# Altium PCB PCB1.PcbDoc
Units mm, origin at the board's own origin, x right, y up, seen from the top; angles counter-clockwise.
Board outline 20.32 x 37.08 mm, 4 copper layers (Top Copper, Signal Layer 1, Signal Layer 2, Bottom Copper), stack 1.17 mm thick; 33 components, 26 nets, 122 pads, 45 vias.
Unrouted connection lines stored in the file: 37.
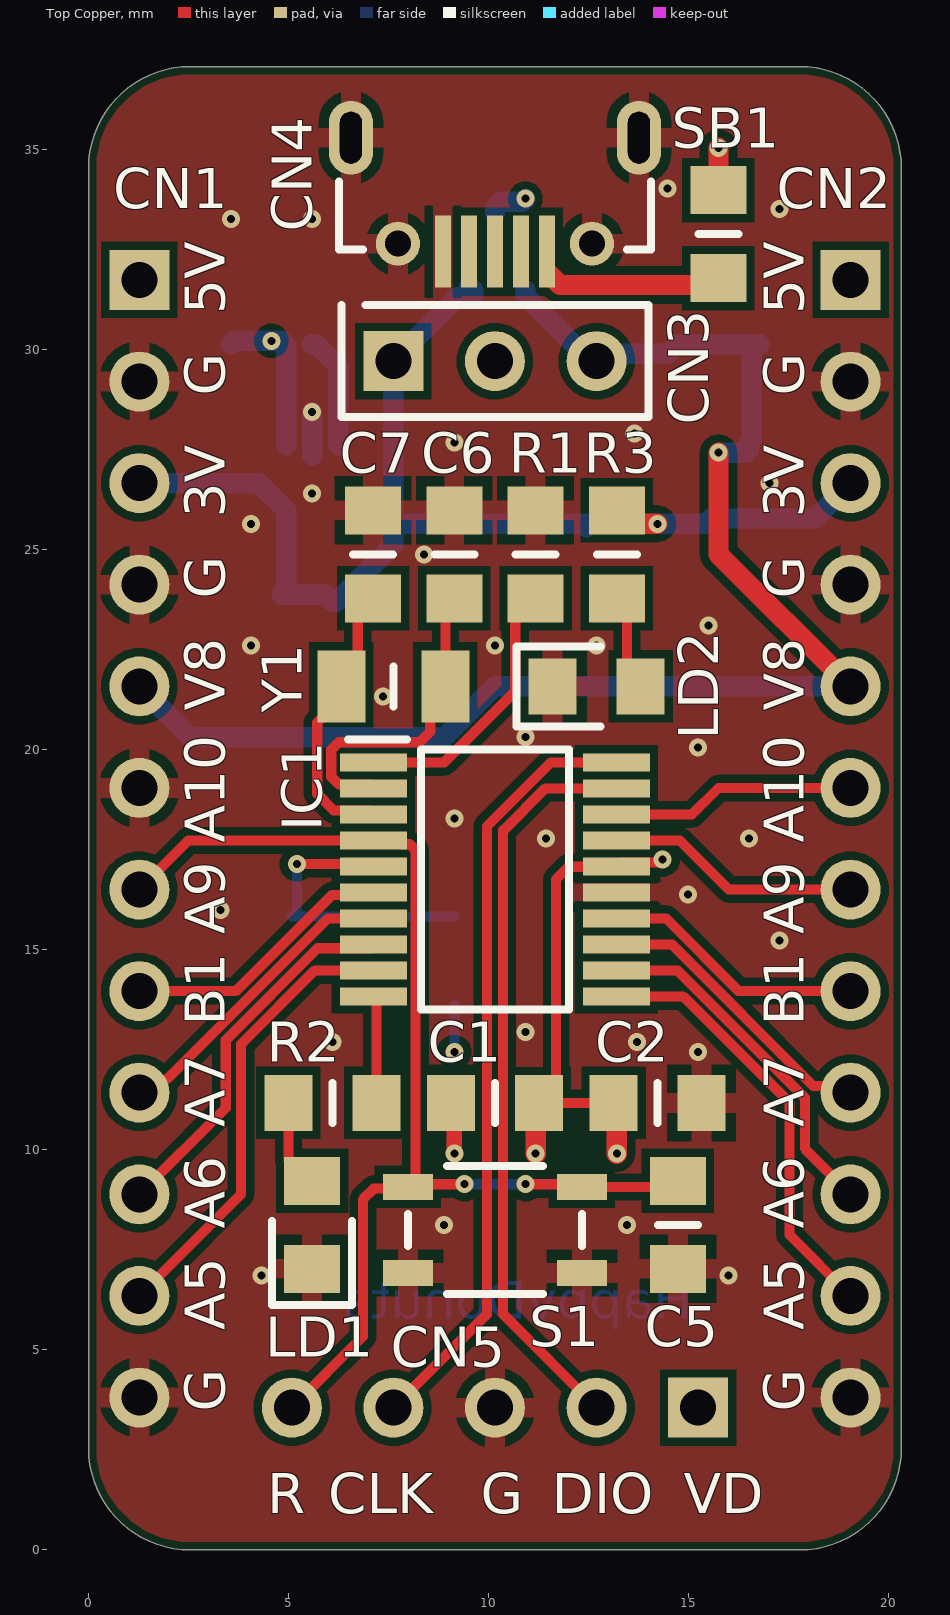
[diagram p0: Top Copper view]
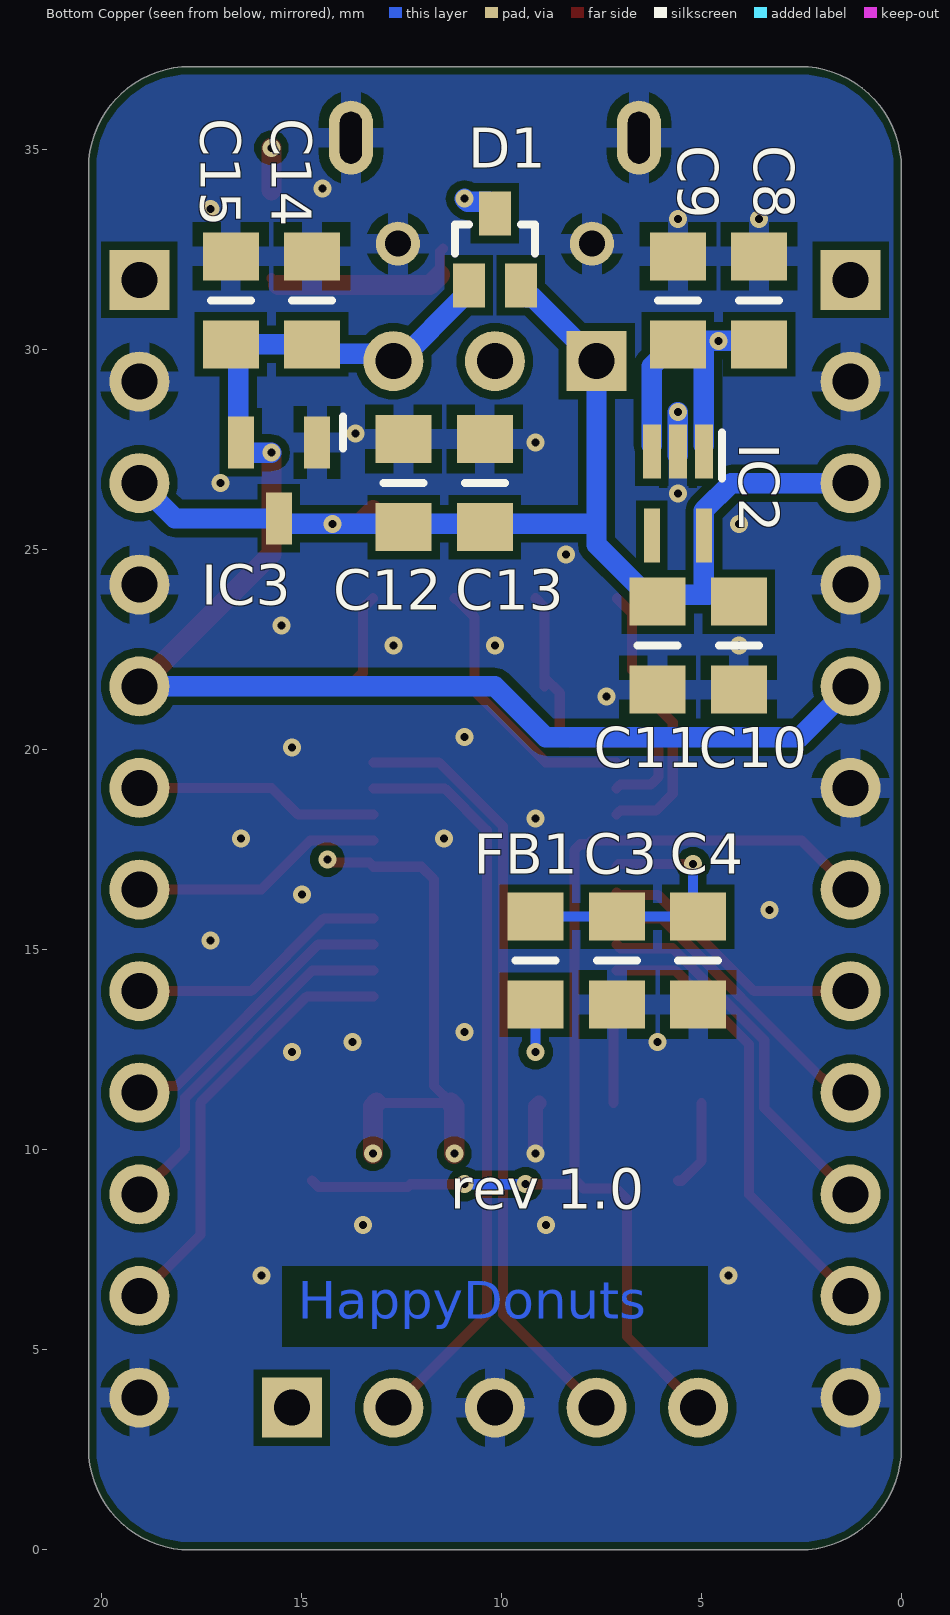
[diagram p1: Bottom Copper view, seen from below]
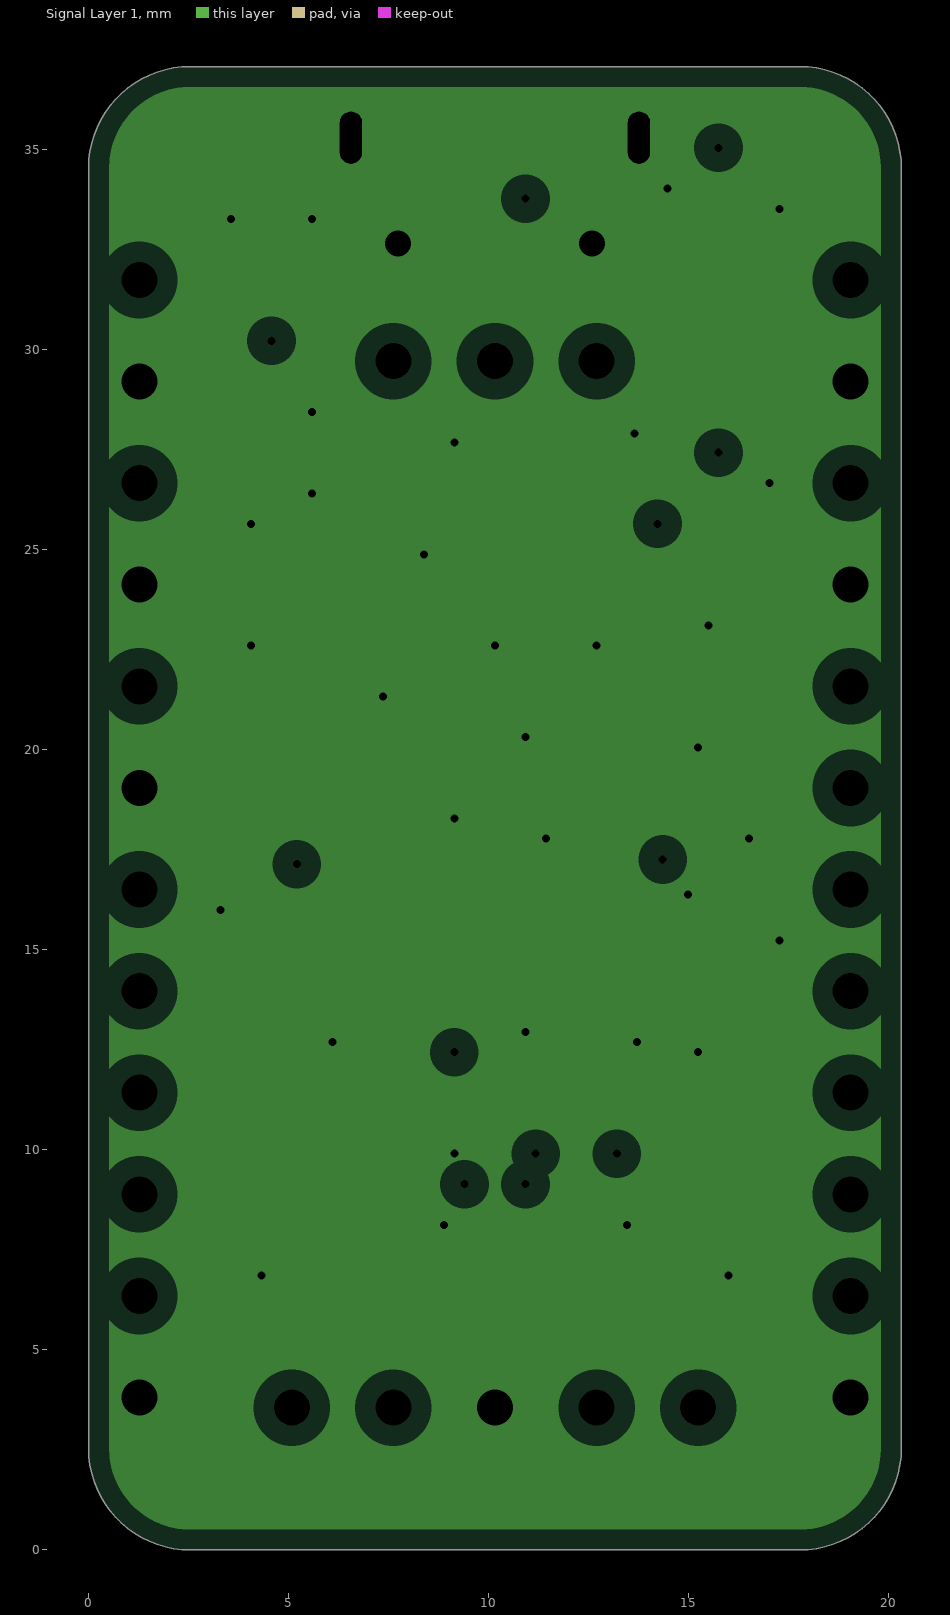
[diagram p2: Signal Layer 1, clearances drawn from the general rule]
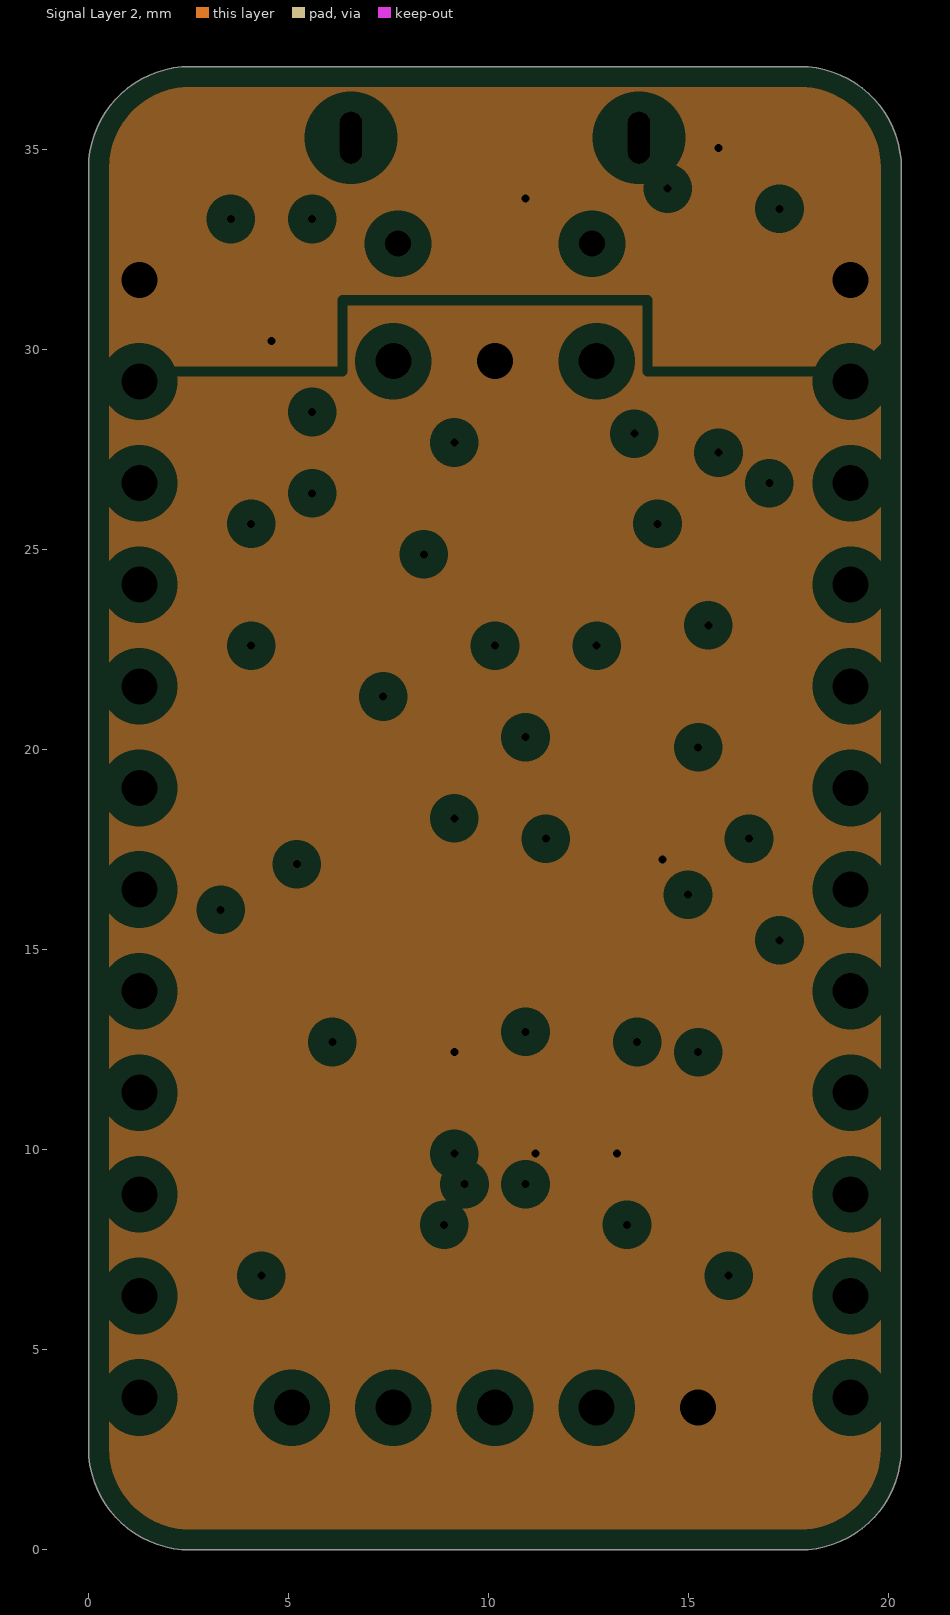
[diagram p3: Signal Layer 2, clearances drawn from the general rule]
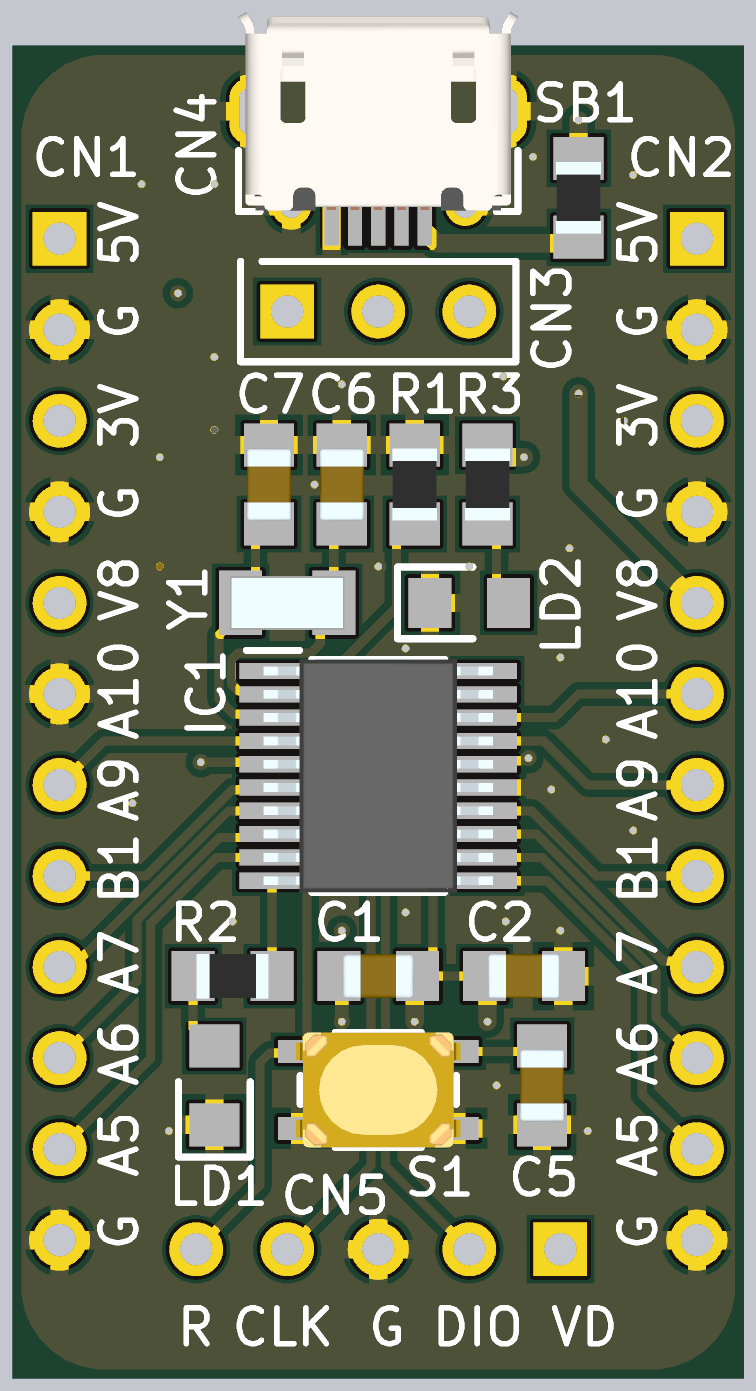
[diagram p4: 3D render of the assembled board from above, using the file's embedded part models]
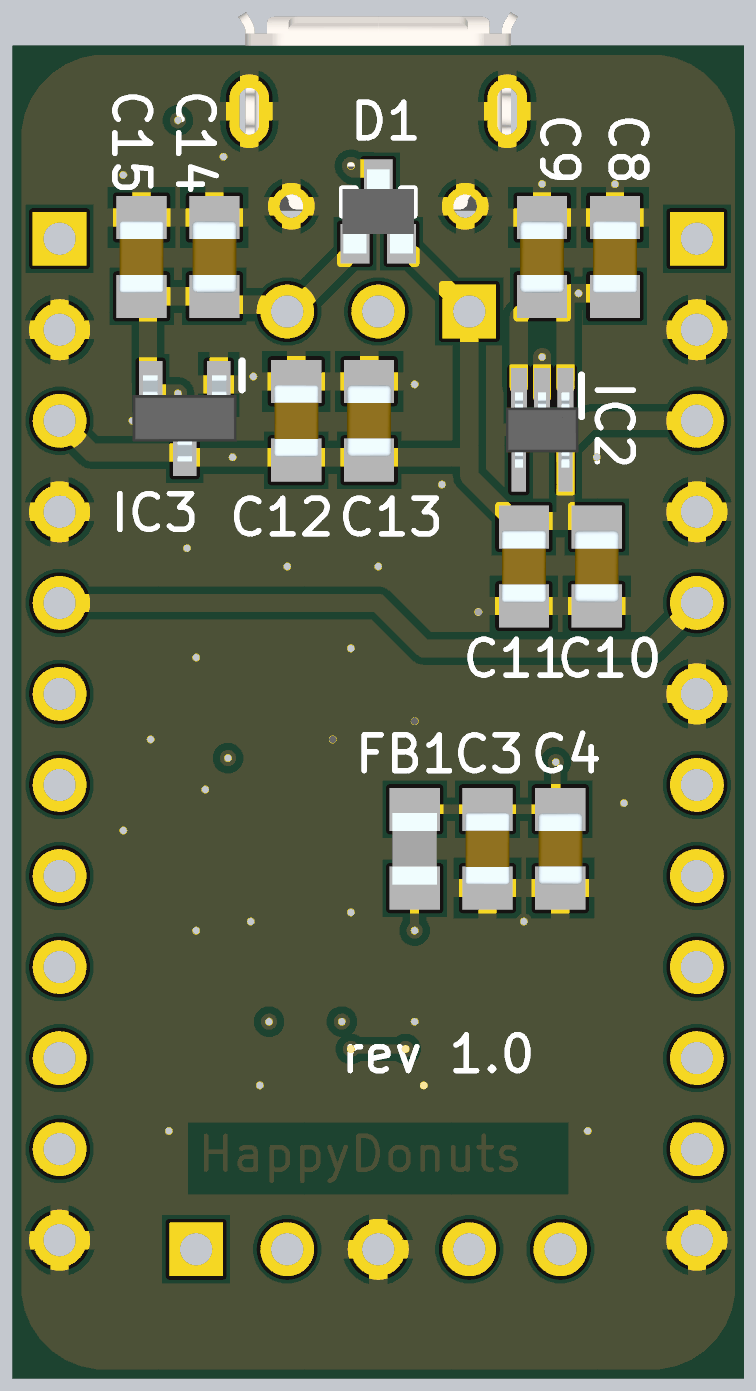
[diagram p5: 3D render of the assembled board from below, using the file's embedded part models]

## Layer stack, top to bottom
Top Mask: solder mask 0.015, Solder Resist, Dk 3.8
Top Copper: signal copper 0.035
Dielectric 1: prepreg 0.2, 7628, Dk 4.6
Signal Layer 1: plane copper 0.0175, net GND
Core: core 0.665, FR-4, Dk 4.5
Signal Layer 2: plane copper 0.0175, net (Multiple Nets)
Dielectric 2: prepreg 0.2, 7628, Dk 4.6
Bottom Copper: signal copper 0.035
Bottom Mask: solder mask 0.015, Solder Resist, Dk 3.8

## Board outline
0,2.54 0,34.544 cw(c2.54,34.544) 2.54,37.084 17.78,37.084 cw(c17.78,34.544) 20.32,34.544 20.32,2.54 cw(c17.78,2.54) 17.78,0 2.54,0 cw(c2.54,2.54)

## Design rules (kind name [scope] priority, off if disabled: settings)
BoardOutlineClearance [All] p1: gap=0.2 ignorepadtopadclearanceinfootprint=FALSE except(0.4: Arc-SplitBarrior Arc-SplitContinuation Track-SplitBarrior Track-SplitContinuation SMDPad-SplitBarrior SMDPad-SplitContinuation THPad-SplitBarrior THPad-SplitContinuation Via-SplitBarrior Via-SplitContinuation Fill-SplitBarrior Fill-SplitContinuation Poly-SplitBarrior Poly-SplitContinuation Region-SplitBarrior Region-SplitContinuation Text-SplitBarrior Text-SplitContinuation)
Clearance "Clearance Bottom Layer" [OnLayer('Bottom Layer')] p1: gap=0.203 ignorepadtopadclearanceinfootprint=TRUE except(0.254: Arc-Text Track-Text SMDPad-Text THPad-Text Via-Text Fill-Text Poly-Text Region-Text Text-Text)
Clearance "Clearance Top Layer" [OnLayer('Top Layer')] p2: gap=0.203 ignorepadtopadclearanceinfootprint=TRUE except(0.254: Arc-Text Track-Text SMDPad-Text THPad-Text Via-Text Fill-Text Poly-Text Region-Text Text-Text)
Clearance [All] p3: gap=0.2 ignorepadtopadclearanceinfootprint=FALSE except(0.089: Arc-Arc Arc-Track Arc-SMDPad Track-Track Track-SMDPad SMDPad-SMDPad; 0.127: Arc-Via Track-Via SMDPad-Via THPad-Via Via-Via; 0.254: Arc-Text Track-Text SMDPad-Text THPad-Text Via-Text Fill-Text Poly-Text Region-Text Text-Text)
HoleSize [All] p1: absolutevalues=TRUE maxlimit=6.3 minlimit=0.2 maxpercent=80.000 minpercent=20.000
MinimumAnnularRing [All] p1: minimumring=0.076
MinimumSolderMaskSliver [All] p1: minsoldermaskwidth=0.1
PlaneClearance [All] p1: clearance=0.508
PlaneConnect [All] p1: pad.planeconnectstyle=Relief pad.reliefexpansion=0.508 pad.reliefentries=4 pad.reliefconductorwidth=0.254 pad.reliefairgap=0.254 via.planeconnectstyle=Direct via.reliefexpansion=0.508 via.reliefentries=4 via.reliefconductorwidth=0.254 via.reliefairgap=0.254
PolygonConnect PolygonConnect_1 [All] p1: thpad.connectstyle=Relief thpad.reliefconductorwidth=0.508 thpad.reliefentries=4 thpad.polygonreliefangle="90 Angle" thpad.airgapwidth=0.254 smdpad.connectstyle=Relief smdpad.reliefconductorwidth=0.508 smdpad.reliefentries=4 smdpad.polygonreliefangle="90 Angle" smdpad.airgapwidth=0.254 via.connectstyle=Direct via.reliefconductorwidth=0.508 via.reliefentries=4 via.polygonreliefangle="90 Angle" via.airgapwidth=0.254
RoutingCorners [All] p1: cornerstyle=Round minsetback=2.54 maxsetback=2.54
RoutingVias [All] p1: holewidth=0.5 width=1 viastyle="Through Hole" minholewidth=0.2 minwidth=0.45 maxholewidth=1 maxwidth=2
SilkToSilkClearance [All] p1: silktosilkclearance=0.1
SilkToSolderMaskClearance [IsPad] p1: minsilkscreentomaskgap=0.1 clearancetoexposedcopper=TRUE
SolderMaskExpansion [All] p1: expansion=0.102 istentingtop=FALSE
Width [All] p1: maxlimit=2.54 minlimit=0.089 preferedwidth=0.381
23 further rules are at their usual default settings.

## Components (designator, comment, footprint, x,y, rotation, side; value= is the part's Value field where it differs from the comment)
C1 "CL21A475KBQNNNE" CAPC2012X135N 10.16,11.176 r180 top value=4.7uF
C2 "CL21B104KBCNNNC" CAPC2012X94N 14.224,11.176 r180 top value=100nF
C3 "CL21B104KBCNNNC" CAPC2012X94N 7.112,14.732 r90 bottom value=100nF
C4 "CL21B105KBFNNNE" CAPC2012X135N 5.08,14.732 r90 bottom value=1uF
C5 "CL21B104KBCNNNC" CAPC2012X94N 14.732,8.128 r270 top value=100nF
C6 "CC0805CRNPO9BN6R8" CAPC2012X94N 9.144,24.892 r270 top value=6.8pF
C7 "CC0805CRNPO9BN6R8" CAPC2012X94N 7.112,24.892 r270 top value=6.8pF
C8 "CL21B104KBCNNNC" CAPC2012X94N 3.556,31.242 r270 bottom value=100nF
C9 "CL21B105KBFNNNE" CAPC2012X135N 5.588,31.242 r270 bottom value=1uF
C10 "CL21B105KBFNNNE" CAPC2012X135N 4.064,22.606 r90 bottom value=1uF
C11 "CL21B104KBCNNNC" CAPC2012X94N 6.096,22.606 r90 bottom value=100nF
C12 "CL21B104KBCNNNC" CAPC2012X94N 12.446,26.67 r270 bottom value=100nF
C13 "CL21B105KBFNNNE" CAPC2012X135N 10.414,26.67 r270 bottom value=1uF
C14 "CL21B105KBFNNNE" CAPC2012X135N 14.732,31.242 r270 bottom value=1uF
C15 "CL21B104KBCNNNC" CAPC2012X94N 16.764,31.242 r270 bottom value=100nF
CN1 "CN_12PIN" CN_12PIN 1.27,31.75 r270 top
CN2 "CN_12PIN" CN_12PIN 19.05,31.75 r270 top
CN3 "CN_3PIN" CN_3PIN 7.62,29.718 r0 top
CN4 "USB_B_AE" USB_B_AE 10.16,35.306 r180 top
CN5 "CN_5PIN" CN_5PIN 15.24,3.556 r180 top
D1 "RB715UMTL" DAN217UMTL 10.16,32.512 r180 bottom
FB1 "FBMJ2125HS250NT" BEADC2012X105N 9.144,14.732 r90 bottom value=25Ohms/4mOhms
IC1 "STM32L031F4P6" SOP65P640X120-20N 10.16,16.764 r0 top
IC2 "MIC5366-3.3YC5-TR" SOT65P210X110-5N 5.588,26.416 r270 bottom value=3.3V/150mA
IC3 "AP2120N-1.8TRG1" SOT95P230X110-3N 15.56,26.736 r270 bottom value=1.8V/150mA
LD1 "LTST-C171KSKT" LEDC2012X85N_Y 5.588,8.128 r90 top value=Yellow/20mA
LD2 "LTST-C171KGKT" LEDC2012X85N_G 12.7,21.59 r0 top value=Green/20mA
R1 "RC0805FR-0710KL" RESC2012X60N 11.176,24.892 r270 top value=10k
R2 "RC0805FR-07510RL" RESC2012X60N 6.096,11.176 r180 top value=510
R3 "RC0805FR-07510RL" RESC2012X60N 13.208,24.892 r90 top value=510
S1 "PTS815_SJM_250_SMTR_LFS" PTS815SJM250SMTRLFS 10.16,8.001 r180 top
SB1 "RC0805FR-070RL" RESC2012X60N 15.748,32.893 r90 top
Y1 "Q13FC1350000200" Q13FC1350000200 7.62,21.59 r180 top value=32.768kHz/7pF/70kOhms

## Footprints (in the part's own frame and the unit in brackets; to place one, negate y for a bottom-side part, rotate by r counter-clockwise, add the part's x,y. Pads: shape width x height; smd on the part's side, far side on the other; paste and mask are expansions set on the pad)
BEADC2012X105N [mm]
  rect 1.2x1.4 smd: 1(-1.1,0) 2(1.1,0)
  silkscreen extent 0,-0.5 0,0.5, body extent -1,-0.63 1,0.63, height 1.05
CAPC2012X94N [mm]
  rect 1.2x1.4 smd: 1(-1.1,0) 2(1.1,0)
  silkscreen extent 0,-0.5 0,0.5, body extent -1,-0.63 1,0.63, height 0.94
CAPC2012X135N [mm]
  rect 1.2x1.4 smd: 1(-1.1,0) 2(1.1,0)
  silkscreen extent 0,-0.5 0,0.5, body extent -1,-0.63 1,0.63, height 1.35
CN_3PIN [mm] "Connector; Edge; 22 Position"
  rect 1.5x1.5 hole 0.9: 1(0,0)
  round 1.5 hole 0.9: 2(2.54,0) 3(5.08,0)
  silkscreen extent -1.3,-1.4 6.38,1.4, body extent -1.17,-1.25 6.45,1.25, height 8.2
CN_5PIN [mm] "Connector; Edge; 22 Position"
  rect 1.5x1.5 hole 0.9: 1(0,0)
  round 1.5 hole 0.9: 2(2.54,0) 3(5.08,0) 4(7.62,0) 5(10.16,0)
  body extent -1.17,-1.25 11.53,1.25, height 1.8
CN_12PIN [mm] "Connector; Edge; 22 Position"
  rect 1.5x1.5 hole 0.9: 1(0,0)
  round 1.5 hole 0.9: 2(2.54,0) 3(5.08,0) 4(7.62,0) 5(10.16,0) 6(12.7,0) 7(15.24,0) 8(17.78,0) 9(20.32,0) 10(22.86,0) 11(25.4,0) 12(27.94,0)
  body extent -1.17,-1.25 29.31,1.25, height 1.8
DAN217UMTL [mm]
  rect 0.8x1.1 smd: 1(-0.65,-0.9) 2(0.65,-0.9) 3(0,0.9)
  silkscreen extent -1,-0.1 1,0.63, body extent -1,-1.17 1,1.17, height 1.1
LEDC2012X85N_G [mm]
  rect 1.2x1.4 smd: 1(-1.1,0) 2(1.1,0)
  silkscreen extent -2,-1 0.1,1, body extent -1,-0.63 1,0.63, height 1.1
LEDC2012X85N_Y [mm]
  rect 1.2x1.4 smd: 1(-1.1,0) 2(1.1,0)
  silkscreen extent -2,-1 0.1,1, body extent -1,-0.63 1,0.63, height 1.1
PTS815SJM250SMTRLFS [mm]
  rect 1.25x0.65 smd: 1(-2.175,1.075) 2(2.175,1.075) 3(-2.175,-1.075) 4(2.175,-1.075)
  silkscreen extent -2.17,-1.6 2.17,1.6, body extent -2.3,-1.6 2.3,1.6, height 2.64
Q13FC1350000200 [mm]
  rect 1.2x1.8 smd: 1(-1.3,0) 2(1.3,0)
  silkscreen extent 0,-0.5 0,0.5, body extent -1.6,-0.75 1.6,0.75, height 0.9
RESC2012X60N [mm]
  rect 1.2x1.4 smd: 1(-1.1,0) 2(1.1,0)
  silkscreen extent 0,-0.5 0,0.5, body extent -1,-0.63 1,0.63, height 0.6
SOP65P640X120-20N [mm]
  rect 1.675x0.45 smd: 1(-3.038,2.925) 2(-3.038,2.275) 3(-3.038,1.625) 4(-3.038,0.975) 5(-3.038,0.325) 6(-3.038,-0.325) 7(-3.038,-0.975) 8(-3.038,-1.625) 9(-3.038,-2.275) 10(-3.038,-2.925) 11(3.038,-2.925) 12(3.038,-2.275) 13(3.038,-1.625) 14(3.038,-0.975) 15(3.038,-0.325) 16(3.038,0.325) 17(3.038,0.975) 18(3.038,1.625) 19(3.038,2.275) 20(3.038,2.925)
  silkscreen extent -3.67,-3.25 1.85,3.5, body extent -3.2,-3.25 3.2,3.25, height 1.2
SOT65P210X110-5N [mm]
  rect 1.35x0.45 smd: 1(-1.05,0.65) 2(-1.05,0) 3(-1.05,-0.65)
  rect 1.35x0.4 smd: 4(1.05,-0.65) 5(1.05,0.65)
  silkscreen extent -1.53,1.1 -0.38,1.1, body extent -1.05,-1.01 1.05,1.01, height 1.1
SOT95P230X110-3N [mm]
  rect 1.3x0.65 smd: 1(-0.95,0.95) 2(-0.95,-0.95) 3(0.95,0)
  silkscreen extent -1.6,1.6 -0.8,1.6, body extent -1.2,-1.45 1.2,1.45, height 1.2
USB_B_AE [mm]
  rect 0.4x1.8 smd mask+0.125: 1(-1.3,2.85) 2(-0.65,2.85) 3(0,2.85) 4(0.65,2.85) 5(1.3,2.85)
  round 1.1 hole 0.65: S1(2.425,2.65) S4(-2.425,2.65)
  oval 1.1x1.85 hole 0.55 slot 1.3 at 90 deg: S2(3.6,0) S3(-3.6,0)
  silkscreen extent -3.9,1.1 3.9,2.8, body extent -3.9,-2.77 3.9,2.77, height 2.49

## Part data
C1: "Capacitor", Manufacturer_Name="Samsung Electro-Mechanics", Mouser Part Number=187-CL21A475KBQNNNE, Datasheet Link=https://www.mouser.fr/datasheet/2/585/MLCC-1837944.pdf, Height=1.35mm, Manufacturer_Part_Number=CL21A475KBQNNNE
C2 C3 C5 C8 C11 C12 C15: "Capacitor", Manufacturer_Name="Samsung Electro-Mechanics", Mouser Part Number=187-CL21B104KBCNNNC, Arrow Part Number=CL21B104KBCNNNC, Arrow Price/Stock=https://www.arrow.com/en/products/cl21b104kbcnnnc/samsung-electro-mechanics?region=europe, Datasheet Link=https://datasheet.datasheetarchive.com/originals/distributors/Datasheets_SAMA/86a3eaf0882763ef32124d5901f9b833.pdf, Height=0.95mm, Manufacturer_Part_Number=CL21B104KBCNNNC, Mouser Price/Stock=https://www.mouser.co.uk/ProductDetail/Samsung-Electro-Mechanics/CL21B104KBCNNNC?qs=349EhDEZ59pEfpnm5yBEmQ%3D%3D
C4 C9 C10 C13 C14: "Capacitor", Manufacturer_Name="Samsung Electro-Mechanics", Mouser Part Number=187-CL21B105KBFNNNE, Arrow Part Number=CL21B105KBFNNNE, Arrow Price/Stock=https://www.arrow.com/en/products/cl21b105kbfnnne/samsung-electro-mechanics?region=europe, Datasheet Link=https://componentsearchengine.com/Datasheets/2/CL21B105KBFNNNE.pdf, Height=1.35mm, Manufacturer_Part_Number=CL21B105KBFNNNE, Mouser Price/Stock=https://www.mouser.co.uk/ProductDetail/Samsung-Electro-Mechanics/CL21B105KBFNNNE?qs=yOVawPpwOwmddQEBPU6Y9A%3D%3D
C6 C7: "Capacitor", Manufacturer_Name="YAGEO (PHYCOMP)", Mouser Part Number=603-CC805CRNPO9BN6R8, Datasheet Link=https://componentsearchengine.com/Datasheets/1/CC0805CRNPO9BN6R8.pdf, Height=0.7mm, Manufacturer_Part_Number=CC0805CRNPO9BN6R8, Mouser Price/Stock=https://www.mouser.co.uk/ProductDetail/YAGEO/CC0805CRNPO9BN6R8?qs=5q%252BqlK8CmJQXpKtionjueA%3D%3D
CN1 CN2 CN3 CN5: "Connector"
CN4: "USB connector", Arrow Part Number=TB67H450FNG,EL, Manufacturer_Name="XKB Connectivity", Arrow Price/Stock=https://www.arrow.com/en/products/tb67h450fngel/toshiba?region=nac, Datasheet Link=https://datasheet.lcsc.com/lcsc/2003201905_XKB-Connectivity-U254-051T-4BH83-S1S_C319160.pdf, Mouser Price/Stock=https://www.mouser.co.uk/ProductDetail/Toshiba/TB67H450FNGEL?qs=h6V4JsTaLXeReNg2bp0jug%3D%3D
D1: "Schottky Diode", Manufacturer_Name="ROHM Semiconductor", Mouser Part Number=755-RB715UMTL, Datasheet Link=http://uk.rs-online.com/web/p/products/1835297, Height=1mm, Manufacturer_Part_Number=RB715UMTL, Mouser Price/Stock=https://www.mouser.co.uk/ProductDetail/ROHM-Semiconductor/RB715UMTL?qs=HXFqYaX1Q2wTXMfu8QxCQg%3D%3D
FB1: "Ferrite Bead", Manufacturer_Name="TAIYO YUDEN", Mouser Part Number=963-FBMJ2125HS250NT, Arrow Part Number=FBMJ2125HS250NT, Arrow Price/Stock=https://www.arrow.com/en/products/fbmj2125hs250nt/taiyo-yuden, Datasheet Link=https://mouser.componentsearchengine.com/Datasheets/1/FBMJ2125HS250NT.pdf, Height=1.05mm, Manufacturer_Part_Number=FBMJ2125HS250NT, Mouser Price/Stock=https://www.mouser.co.uk/ProductDetail/Taiyo-Yuden/FBMJ2125HS250NT?qs=I6KAKw0tg2w%2F7qNkMvc%2FCQ%3D%3D
IC1: "Integrated Circuit", Manufacturer_Name=STMicroelectronics, Mouser Part Number=511-STM32L031F4P6, Arrow Part Number=STM32L031F4P6, Arrow Price/Stock=https://www.arrow.com/en/products/stm32l031f4p6/stmicroelectronics, Datasheet Link=http://www.st.com/resource/en/datasheet/stm32l031f4.pdf, Height=1.2mm, Manufacturer_Part_Number=STM32L031F4P6, Mouser Price/Stock=https://www.mouser.co.uk/ProductDetail/STMicroelectronics/STM32L031F4P6?qs=dTJS0cRn7ohU%2FRoH6ms1pg%3D%3D
IC2: "LDO", Manufacturer_Name=Microchip, Mouser Part Number=998-MIC5366-3.3YC5TR, Arrow Part Number=MIC5366-3.3YC5-TR, Arrow Price/Stock=https://www.arrow.com/en/products/mic5365-3.3yc5-tr/microchip-technology?region=nac, Datasheet Link=http://www.mouser.com/ds/2/268/mic5365-779177.pdf, Height=1.1mm, Manufacturer_Part_Number=MIC5366-3.3YC5-TR, Mouser Price/Stock=https://www.mouser.co.uk/ProductDetail/Microchip-Technology-Micrel/MIC5365-33YC5-TR?qs=U6T8BxXiZAXvJj%252BPZ%252B301w%3D%3D
IC3: "LDO", Manufacturer_Name="Diodes Inc.", Mouser Part Number=621-AP2120N-1.8TRG1, Arrow Part Number=AP2120N-1.8TRG1, Arrow Price/Stock=https://www.arrow.com/en/products/ap2120n-1.8trg1/diodes-incorporated, Datasheet Link=https://datasheet.datasheetarchive.com/originals/distributors/Datasheets_SAMA/eefff3041187ea13496cd4a0771f8fec.pdf, Height=1.1mm, Manufacturer_Part_Number=AP2120N-1.8TRG1, Mouser Price/Stock=https://www.mouser.co.uk/ProductDetail/Diodes-Incorporated/AP2120N-18TRG1?qs=x6A8l6qLYDC3T4tUK6BUJA%3D%3D
LD1: "LED", Manufacturer_Name=Lite-On, Mouser Part Number=859-LTST-C171KSKT, Arrow Part Number=LTST-C171KSKT, Arrow Price/Stock=https://www.arrow.com/en/products/ltst-c171kskt/lite-on-technology?region=nac, Datasheet Link=https://componentsearchengine.com/Datasheets/1/LTST-C171KSKT.pdf, Height=0.9mm, Manufacturer_Part_Number=LTST-C171KSKT, Mouser Price/Stock=https://www.mouser.co.uk/ProductDetail/Lite-On/LTST-C171KSKT?qs=llMtm9xcdM0CwR1bByTaUQ%3D%3D
LD2: "LED", Manufacturer_Name=Lite-On, Mouser Part Number=859-LTST-C171KGKT, Arrow Part Number=LTST-C171KGKT, Arrow Price/Stock=https://www.arrow.com/en/products/ltst-c171kgkt/lite-on-technology?region=nac, Datasheet Link=https://optoelectronics.liteon.com/upload/download/DS22-2000-118/LTST-C171KGKT.pdf, Height=0.9mm, Manufacturer_Part_Number=LTST-C171KGKT, Mouser Price/Stock=https://www.mouser.co.uk/ProductDetail/Lite-On/LTST-C171KGKT?qs=j1zysehuyChA38z%2F%252BFfUSw%3D%3D
R1: "Resistor", Manufacturer_Name="YAGEO (PHYCOMP)", Mouser Part Number=603-RC0805FR-0710KL, Arrow Part Number=RC0805FR-0710KL, Arrow Price/Stock=https://www.arrow.com/en/products/rc0805fr-0710kl/yageo?region=europe, Datasheet Link=https://datasheet.datasheetarchive.com/originals/distributors/Datasheets_SAMA/902f9e387b938f871d31120f5fc1d65e.pdf, Height=0.6mm, Manufacturer_Part_Number=RC0805FR-0710KL, Mouser Price/Stock=https://www.mouser.co.uk/ProductDetail/YAGEO/RC0805FR-0710KL?qs=7bY8808IzHq6vrU3BeiiYw%3D%3D
R2 R3: "Resistor", Manufacturer_Name="YAGEO (PHYCOMP)", Mouser Part Number=603-RC0805FR-07510RL, Datasheet Link=https://datasheet.datasheetarchive.com/originals/distributors/Datasheets_SAMA/902f9e387b938f871d31120f5fc1d65e.pdf, Height=0.6mm, Manufacturer_Part_Number=RC0805FR-07510RL, Mouser Price/Stock=https://www.mouser.com/Search/Refine.aspx?Keyword=603-RC0805FR-07510RL
S1: "Switch", Arrow Part Number="PTS815 SJM 250 SMTR LFS", Manufacturer_Name="C & K COMPONENTS", Mouser Part Number=611-PTS815SJM250SMTR, Arrow Price/Stock=https://www.arrow.com/en/products/pts815-sjm-250-smtr-lfs/ck, Datasheet Link="https://componentsearchengine.com/Datasheets/1/PTS815 SJM 250 SMTR LFS.pdf", Height=2.7mm, Manufacturer_Part_Number="PTS815 SJM 250 SMTR LFS", Mouser Price/Stock=https://www.mouser.co.uk/ProductDetail/CK/PTS815-SJM-250-SMTR-LFS?qs=ahcBuItHZ3xKWmfV%2F2E6bA%3D%3D
SB1: "Jumper (0 ohm)", Manufacturer_Name="YAGEO (PHYCOMP)", Mouser Part Number=603-RC0805FR-070RL, Datasheet Link=https://datasheet.datasheetarchive.com/originals/distributors/Datasheets_SAMA/902f9e387b938f871d31120f5fc1d65e.pdf, Height=0.6mm, Manufacturer_Part_Number=RC0805FR-070RL, Mouser Price/Stock=https://www.mouser.co.uk/ProductDetail/YAGEO/RC0805FR-070RL?qs=fRxXYNj8ftF6kXqh1XbZJQ%3D%3D
Y1: "Crystal", Manufacturer_Name="SEIKO EPSON", Datasheet Link=https://datasheet.lcsc.com/szlcsc/Seiko-Epson-Q13FC1350000200_C48615.pdf, Height=0.9mm, Manufacturer_Part_Number=Q13FC1350000200

## Via types
v1: diameter 0.45, hole 0.2, Top Copper to Bottom Copper, tented both sides, 45 vias

## Nets (pads, with @x,y where several pads share a name; then routed paths per layer and width w, separated by ;. In a path a pad name is that pad's centre, name@x,y a point inside that pad or via, vN(x,y) a via of type N, cw(c..) or ccw(c..) an arc to the next point about the centre after c; other vN are vias at no path point)
1V8: C14.2 C15.2 CN1.5 CN2.5 CN3.3 D1.1 IC3.2 | length 36.2
  Top Copper w0.508: v1(15.748,27.432) 15.748,24.892 CN2.5
  Bottom Copper w0.508: CN1.5 2.54,20.32 8.89,20.32 10.16,21.59 CN2.5 ; D1.1@10.922,31.496 10.922,31.35 12.554,29.718 CN3.3 12.89,29.908 14.498,29.908 C14.2 C15.2@16.581,30.142 ; v1(15.748,27.432) 16.439,27.432 16.51,27.503 IC3.2 16.581,27.757 16.581,29.959 C15.2
3V3: C10.2 C11.2 C12.2 C13.2 CN1.3 CN2.3 CN3.1 D1.2 IC2.5 IC3.3 R3.2 | length 30.5
  Top Copper w0.508: R3.2 13.546,25.654 v1(14.224,25.654) ; CN2.3@18.782,26.67 CN2.3
  Bottom Copper w0.508: CN1.3 4.255,26.67 4.938,25.987 IC2.5 4.938,23.988 4.826,23.876 5.926,23.876 C11.2 6.196,23.706 7.62,25.13 7.62,25.654 ; D1.2 9.51,31.462 9.364,31.316 9.218,31.316 CN3.1 7.62,25.654 ; D1.2@9.622,31.346 D1.2@9.622,31.496 ; C12.2 C12.2@12.362,25.654 ; CN2.3 18.166,25.786 IC3.3 15.56,25.725 15.489,25.654 C12.2@12.362,25.654 ; 7.62,25.654 10.414,25.654 C12.2@12.362,25.654
5V: C8.2 C9.2 CN1.1 CN2.1 D1.3 IC2.1 IC2.3 SB1.2 | length 8.9
  Top Copper w0.508: SB1.2 v1(15.748,35.052)
  Bottom Copper w0.508: C8.2 3.64,30.226 v1(4.572,30.226) 4.826,30.226 4.938,30.114 IC2.1@4.938,27.62 ; C9.2 5.688,30.142 6.238,29.592 IC2.3@6.238,27.62 ; D1.3 10.16,33.562 10.306,33.708 10.848,33.708 v1(10.922,33.782)
GND: C1.2 C2.1 C3.1 C4.1 C5.2 C6.1 C7.1 C8.1 C9.1 C10.1 C11.1 C12.1 C13.1 C14.1 C15.1 CN1.2 CN1.4 CN1.6 CN1.12 CN2.2 CN2.4 CN2.12 CN4.5 CN4.S1 CN4.S2 CN4.S3 CN4.S4 CN5.3 IC1.15 IC2.2 IC3.1 LD1.1 LD2.1 R1.1 S1.1 S1.2 | length 2.4
  Top Copper w0.381: C1.2 9.144,11.092 v1(9.144,9.906)
  Bottom Copper w0.508: IC2.2@5.588,27.366 v1(5.588,28.448)
  other v1: 4.318,6.858 16.002,6.858 8.89,8.128 13.462,8.128 15.24,12.446 6.096,12.7 13.716,12.7 10.922,12.954 17.272,15.24 3.302,16.002 14.986,16.383 11.43,17.78 16.51,17.78 9.144,18.288 15.24,20.066 10.922,20.32 7.366,21.336 4.064,22.606 10.16,22.606 12.7,22.606 15.494,23.114 8.382,24.892 4.064,25.654 5.588,26.416 17.018,26.67 9.144,27.686 13.645,27.906 3.556,33.274 5.588,33.274 17.272,33.528 14.478,34.036
NetC6_2: C6.2 IC1.2 Y1.1 | length 8.3
  Top Copper w0.254: IC1.2 7.024,19.137 6.263,19.137 6.223,19.177 6.217,19.177 6.069,19.326 6.069,20.003 6.258,20.193 8.276,20.193 8.541,20.458 8.541,21.427 Y1.1@8.92,21.806 ; Y1.1 Y1.1@8.92,21.806 ; C6.2 8.92,23.568 Y1.1@8.92,21.806
NetC7_2: C7.2 IC1.3 Y1.2 | length 7.1
  Top Copper w0.254: C7.2 6.731,23.411 6.731,22.001 Y1.2 6.32,21.29 5.715,20.685 5.715,18.903 6.131,18.487 7.024,18.487 IC1.3
NetCN4_1: CN4.1 SB1.1 | length 5.1
  Top Copper w0.254: CN4.1@11.46,32.531 11.533,32.458 CN4.1@11.533,31.883 ; SB1.1@15.578,31.623 SB1.1
  Top Copper w0.508: CN4.1@11.533,31.883 11.793,31.623 SB1.1@15.578,31.623
NetIC1_1: IC1.1 R1.2 | length 6.8
  Top Copper w0.254: IC1.1 8.894,19.689 10.668,21.463 10.668,23.319 11.141,23.792 R1.2
NetIC1_10: IC1.10 R2.1 | length 2.7
  Top Copper w0.254: IC1.10 7.196,13.765 R2.1
NetLD1_2: LD1.2 R2.2 | length 2.3
  Top Copper w0.254: R2.2 4.996,9.72 5.488,9.228 LD1.2
NetLD2_2: LD2.2 R3.1 | length 2.4
  Top Copper w0.254: R3.1 13.462,23.538 13.462,21.928 LD2.2
NRST: C5.1 CN1.7 CN5.5 IC1.4 S1.3 S1.4 | length 29.9
  Top Copper w0.254: CN1.7 2.499,17.739 IC1.4 7.735,17.739 7.833,17.641 8.027,17.641 8.175,17.492 8.175,9.266 S1.4 7.942,9.033 7.128,9.033 6.858,8.763 6.858,5.334 CN5.5 ; S1.4@8.175,9.144 v1(9.398,9.144) ; v1(10.922,9.144) 12.267,9.144 S1.3 14.58,9.076 C5.1
  Bottom Copper w0.254: v1(9.398,9.144) v1(10.922,9.144)
PA0: CN1.8 IC1.6 | length 6.9
  Top Copper w0.254: CN1.8 3.683,13.97 6.09,16.377 7.06,16.377 IC1.6
PA1: CN1.9 IC1.7 | length 7.7
  Top Copper w0.254: CN1.9 1.607,11.43 1.974,11.797 1.995,11.797 5.987,15.789 IC1.7
PA2: CN1.10 IC1.8 | length 9.4
  Top Copper w0.254: CN1.10 3.429,11.049 3.429,12.746 5.724,15.041 7.024,15.041 IC1.8
PA3: CN1.11 IC1.9 | length 11.4
  Top Copper w0.254: CN1.11 3.81,8.89 3.81,12.642 5.657,14.489 IC1.9
PA5: CN2.11 IC1.11 | length 10.9
  Top Copper w0.254: IC1.11 14.863,13.839 17.526,11.176 17.526,7.874 CN2.11
PA6: CN2.10 IC1.12 | length 8.9
  Top Copper w0.254: IC1.12 14.721,14.489 17.907,11.303 17.907,10.033 CN2.10
PA7: CN2.9 IC1.13 | length 7.4
  Top Copper w0.254: IC1.13 14.579,15.139 18.123,11.595 18.885,11.595 CN2.9
PA9: CN2.7 IC1.17 | length 6.4
  Top Copper w0.254: IC1.17 14.773,17.739 16.002,16.51 CN2.7
PA10: CN2.6 IC1.18 | length 6.1
  Top Copper w0.254: IC1.18 15.087,18.389 15.748,19.05 CN2.6
PB1: CN2.8 IC1.14 | length 6.6
  Top Copper w0.254: IC1.14 14.437,15.789 16.256,13.97 CN2.8
SWCLK: CN5.4 IC1.20 | length 19.4
  Top Copper w0.254: CN5.4 9.957,5.893 9.957,18.085 11.561,19.689 IC1.20
SWDIO: CN5.2 IC1.19 | length 18.7
  Top Copper w0.254: 10.363,17.996 10.363,5.893 CN5.2 ; 10.376,17.996 11.419,19.039 IC1.19
VDD: C1.1 C2.2 CN3.2 CN5.1 FB1.1 IC1.16 | length 14.3
  Top Copper w0.254: C2.2 C1.1 11.684,11.6 11.684,16.764 12.001,17.081 13.19,17.081 13.296,17.187 14.225,17.187 14.298,17.26 v1(14.351,17.26)
  Top Copper w0.508: v1(11.176,9.906) 11.176,11.092 C1.1 ; C2.2 13.208,11.092 v1(13.208,9.906)
  Bottom Copper w0.254: v1(9.144,12.446) FB1.1
VDDA: C3.2 C4.2 FB1.2 IC1.5 | length 7.4
  Top Copper w0.254: v1(5.207,17.145) 7.066,17.145 IC1.5
  Bottom Copper w0.254: v1(5.207,17.145) 5.207,15.959 C4.2 C3.2 FB1.2
pads on no net: CN4.2 CN4.3 CN4.4 IC2.4

## Polygon pours and split planes (outlines as drawn)
GND on Bottom Copper "GND_L04_P002" (solid, pour order 2): 0,2.54 0,34.544 cw(c2.54,34.544) 2.54,37.084 17.78,37.084 cw(c17.78,34.544) 20.32,34.544 20.32,2.54 cw(c17.78,2.54) 17.78,0 2.54,0 cw(c2.54,2.54)
GND on Top Copper "GND_L01_P001" (solid, pour order 1): 0,2.54 0,34.544 cw(c2.54,34.544) 2.54,37.084 17.78,37.084 cw(c17.78,34.544) 20.32,34.544 20.32,2.54 cw(c17.78,2.54) 17.78,0 2.54,0 cw(c2.54,2.54)
VDD on Signal Layer 2 (split plane): 13.841,29.464 13.85,29.414 13.878,29.372 13.92,29.344 13.97,29.335 19.304,29.335 19.354,29.344 19.396,29.372 19.81,29.786 19.81,2.54 19.811,2.524 19.802,2.341 19.773,2.144 19.724,1.95 19.657,1.762 19.572,1.582 19.469,1.411 19.351,1.251 19.217,1.103 19.069,0.969 18.909,0.851 18.738,0.748 18.558,0.663 18.37,0.596 18.176,0.547 17.979,0.518 17.796,0.509 17.78,0.51 2.54,0.51 2.524,0.509 2.341,0.518 2.144,0.547 1.95,0.596 1.762,0.663 1.582,0.748 1.411,0.851 1.251,0.969 1.103,1.103 0.969,1.251 0.851,1.411 0.748,1.582 0.663,1.762 0.596,1.95 0.547,2.144 0.518,2.341 0.509,2.524 0.51,2.54 0.51,29.335 6.35,29.335 6.4,29.344 6.442,29.372 6.47,29.414 6.479,29.464 6.479,31.113 13.841,31.113
5V on Signal Layer 2 (split plane): 17.979,36.566 18.176,36.537 18.37,36.488 18.558,36.421 18.738,36.336 18.909,36.233 19.069,36.115 19.217,35.981 19.351,35.833 19.469,35.673 19.572,35.502 19.657,35.322 19.724,35.134 19.773,34.94 19.802,34.743 19.811,34.56 19.81,34.544 19.81,30.153 19.25,29.593 14.099,29.593 14.099,31.242 14.09,31.292 14.062,31.334 14.02,31.362 13.97,31.371 6.35,31.371 6.3,31.362 6.258,31.334 6.23,31.292 6.221,31.242 6.221,29.593 0.51,29.593 0.51,34.544 0.509,34.56 0.518,34.743 0.547,34.94 0.596,35.134 0.663,35.322 0.748,35.502 0.851,35.673 0.969,35.833 1.103,35.981 1.251,36.115 1.411,36.233 1.582,36.336 1.762,36.421 1.95,36.488 2.144,36.537 2.341,36.566 2.524,36.575 2.54,36.574 17.78,36.574 17.796,36.575
GND on Signal Layer 1 (split plane): 17.979,36.566 18.176,36.537 18.37,36.488 18.558,36.421 18.738,36.336 18.909,36.233 19.069,36.115 19.217,35.981 19.351,35.833 19.469,35.673 19.572,35.502 19.657,35.322 19.724,35.134 19.773,34.94 19.802,34.743 19.811,34.56 19.81,34.544 19.81,2.54 19.811,2.524 19.802,2.341 19.773,2.144 19.724,1.95 19.657,1.762 19.572,1.582 19.469,1.411 19.351,1.251 19.217,1.103 19.069,0.969 18.909,0.851 18.738,0.748 18.558,0.663 18.37,0.596 18.176,0.547 17.979,0.518 17.796,0.509 17.78,0.51 2.54,0.51 2.524,0.509 2.341,0.518 2.144,0.547 1.95,0.596 1.762,0.663 1.582,0.748 1.411,0.851 1.251,0.969 1.103,1.103 0.969,1.251 0.851,1.411 0.748,1.582 0.663,1.762 0.596,1.95 0.547,2.144 0.518,2.341 0.509,2.524 0.51,2.54 0.51,34.544 0.509,34.56 0.518,34.743 0.547,34.94 0.596,35.134 0.663,35.322 0.748,35.502 0.851,35.673 0.969,35.833 1.103,35.981 1.251,36.115 1.411,36.233 1.582,36.336 1.762,36.421 1.95,36.488 2.144,36.537 2.341,36.566 2.524,36.575 2.54,36.574 17.78,36.574 17.796,36.575

## Other copper
Bottom Copper:
  text "HappyDonuts" at 15.092,5.774 h0.94
Signal Layer 2 (plane layer: these items are gaps in the copper):
  lines w0.254: 0,29.464 6.35,29.464 6.35,31.242 13.97,31.242 13.97,29.464 19.304,29.464 20.32,30.48

## Silkscreen, mask and mechanical layers (free items; w line width, h text height)
Top Overlay:
  text "5V" at 3.404,30.886 h1 r90
  text "5V" at 17.882,30.886 h1 r90
  text "G" at 3.404,28.854 h1 r90
  text "G" at 17.882,28.854 h1 r90
  text "3V" at 3.404,25.806 h1 r90
  text "3V" at 17.882,25.806 h1 r90
  text "G" at 3.404,23.774 h1 r90
  text "G" at 17.882,23.774 h1 r90
  text "V8" at 3.404,20.98 h1 r90
  text "V8" at 17.882,20.98 h1 r90
  text "A10" at 3.404,17.678 h1 r90
  text "A10" at 17.882,17.678 h1 r90
  text "A9" at 3.404,15.392 h1 r90
  text "A9" at 17.882,15.392 h1 r90
  text "B1" at 3.404,13.106 h1 r90
  text "B1" at 17.882,13.106 h1 r90
  text "A7" at 3.404,10.566 h1 r90
  text "A7" at 17.882,10.566 h1 r90
  text "A6" at 3.404,8.026 h1 r90
  text "A6" at 17.882,8.026 h1 r90
  text "A5" at 3.404,5.486 h1 r90
  text "A5" at 17.882,5.486 h1 r90
  text "G" at 3.404,3.454 h1 r90
  text "G" at 17.882,3.454 h1 r90
  text "R" at 4.47,0.914 h1
  text "CLK" at 5.994,0.914 h1
  text "G" at 9.804,0.914 h1
  text "DIO" at 11.582,0.914 h1
  text "VD" at 14.884,0.914 h1
Bottom Overlay:
  text "rev 1.0" at 11.278,8.534 h1
Board Shape:
  the board outline again, w0